# Altium PCB love-flow-lamp.PcbDoc
Units mil, origin at the board's own origin, x right, y up, seen from the top; angles counter-clockwise.
Board outline 3937.01 x 3932.01 mil, 2 copper layers (Top Layer, Bottom Layer); 75 components, 71 nets, 193 pads, 8 vias.
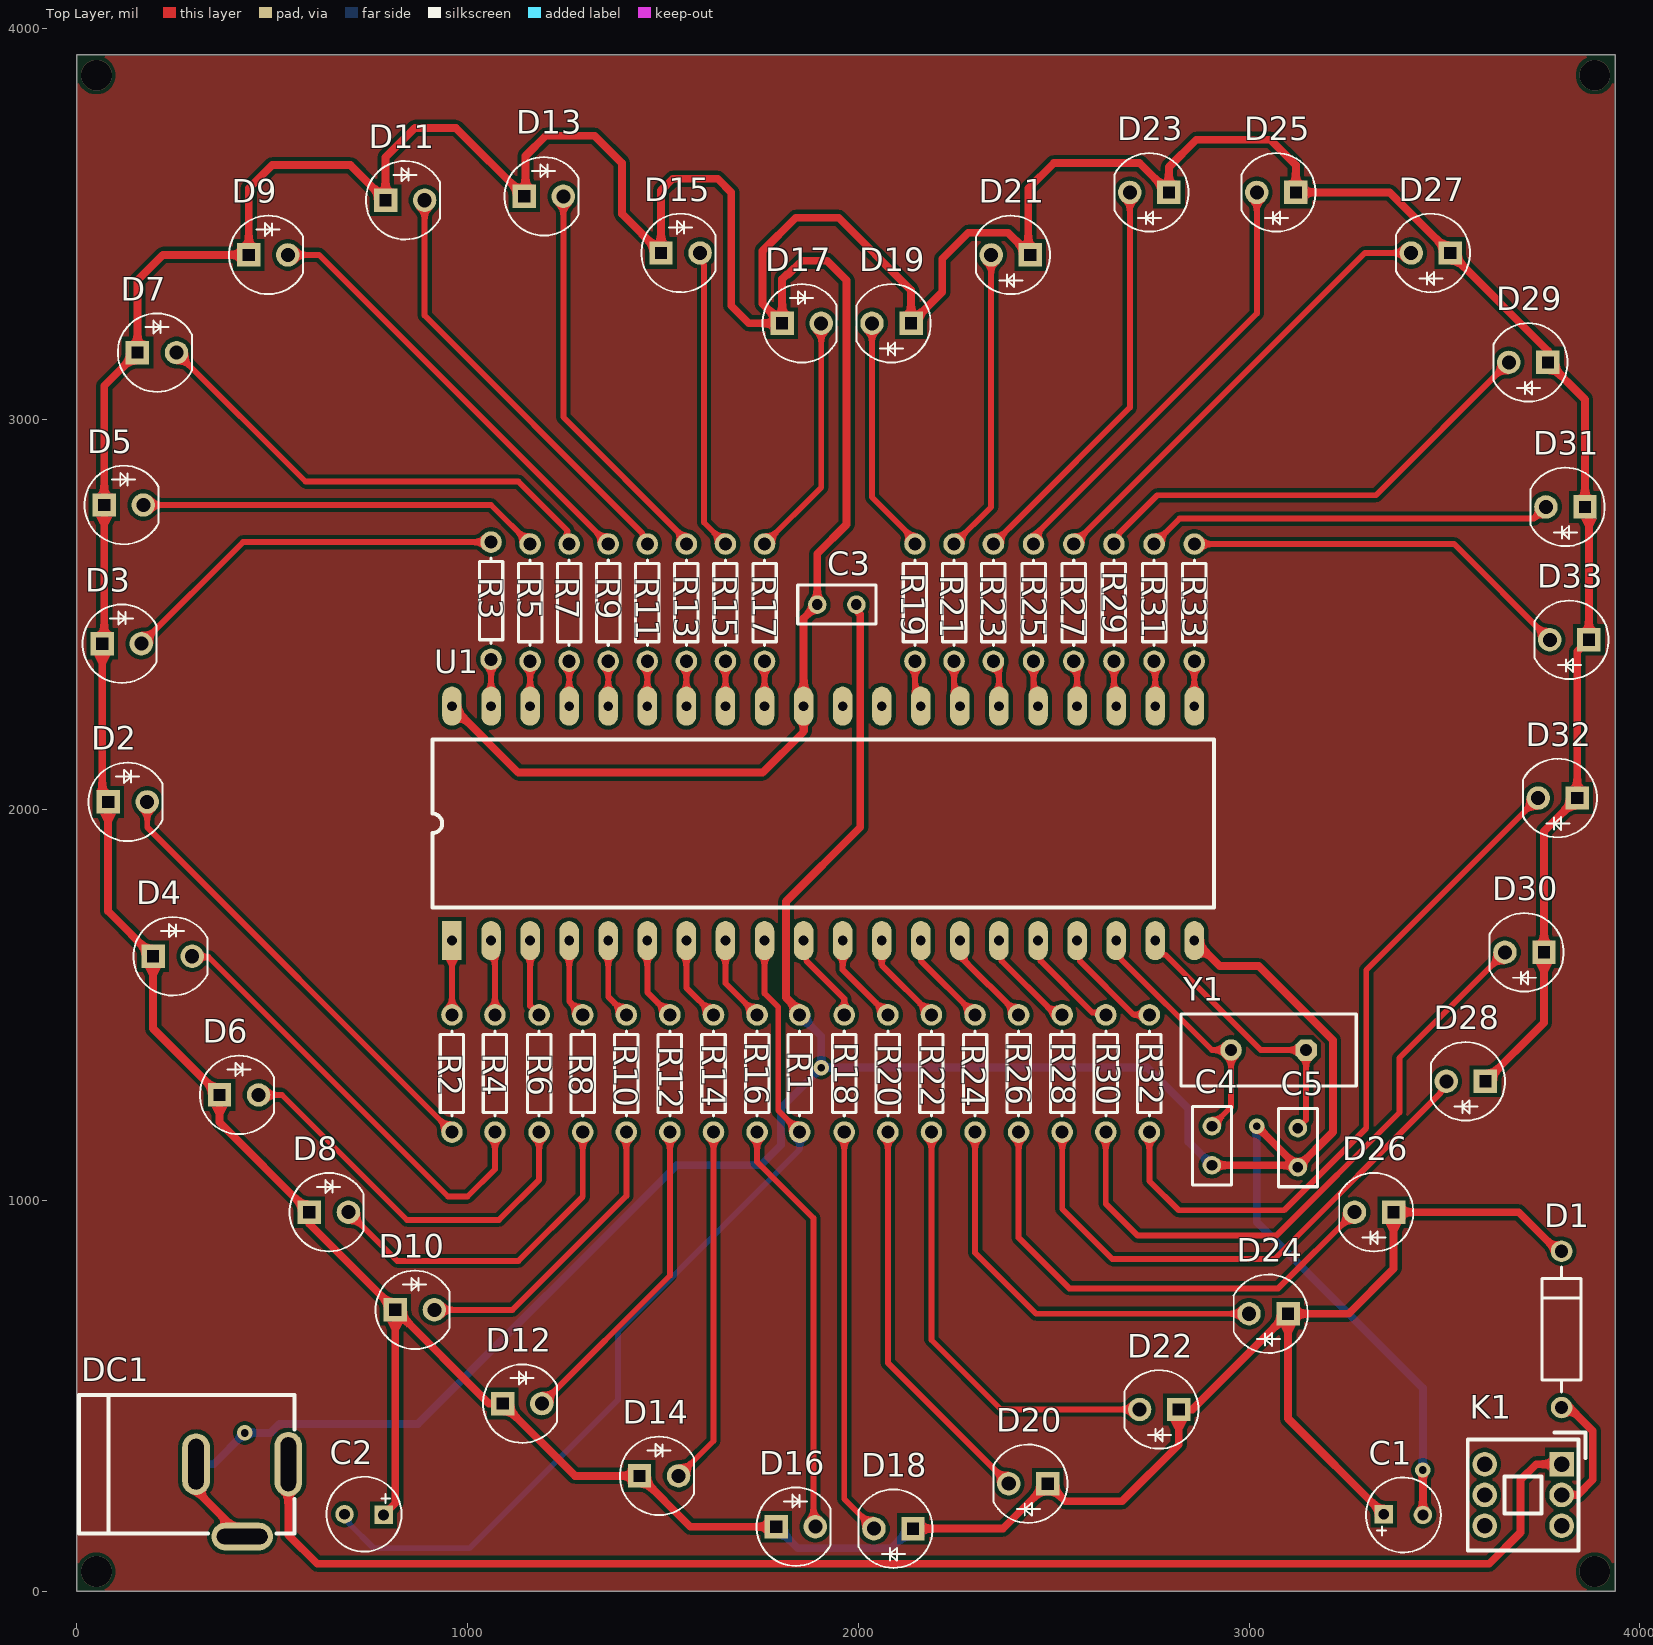
[diagram p0: Top Layer view]
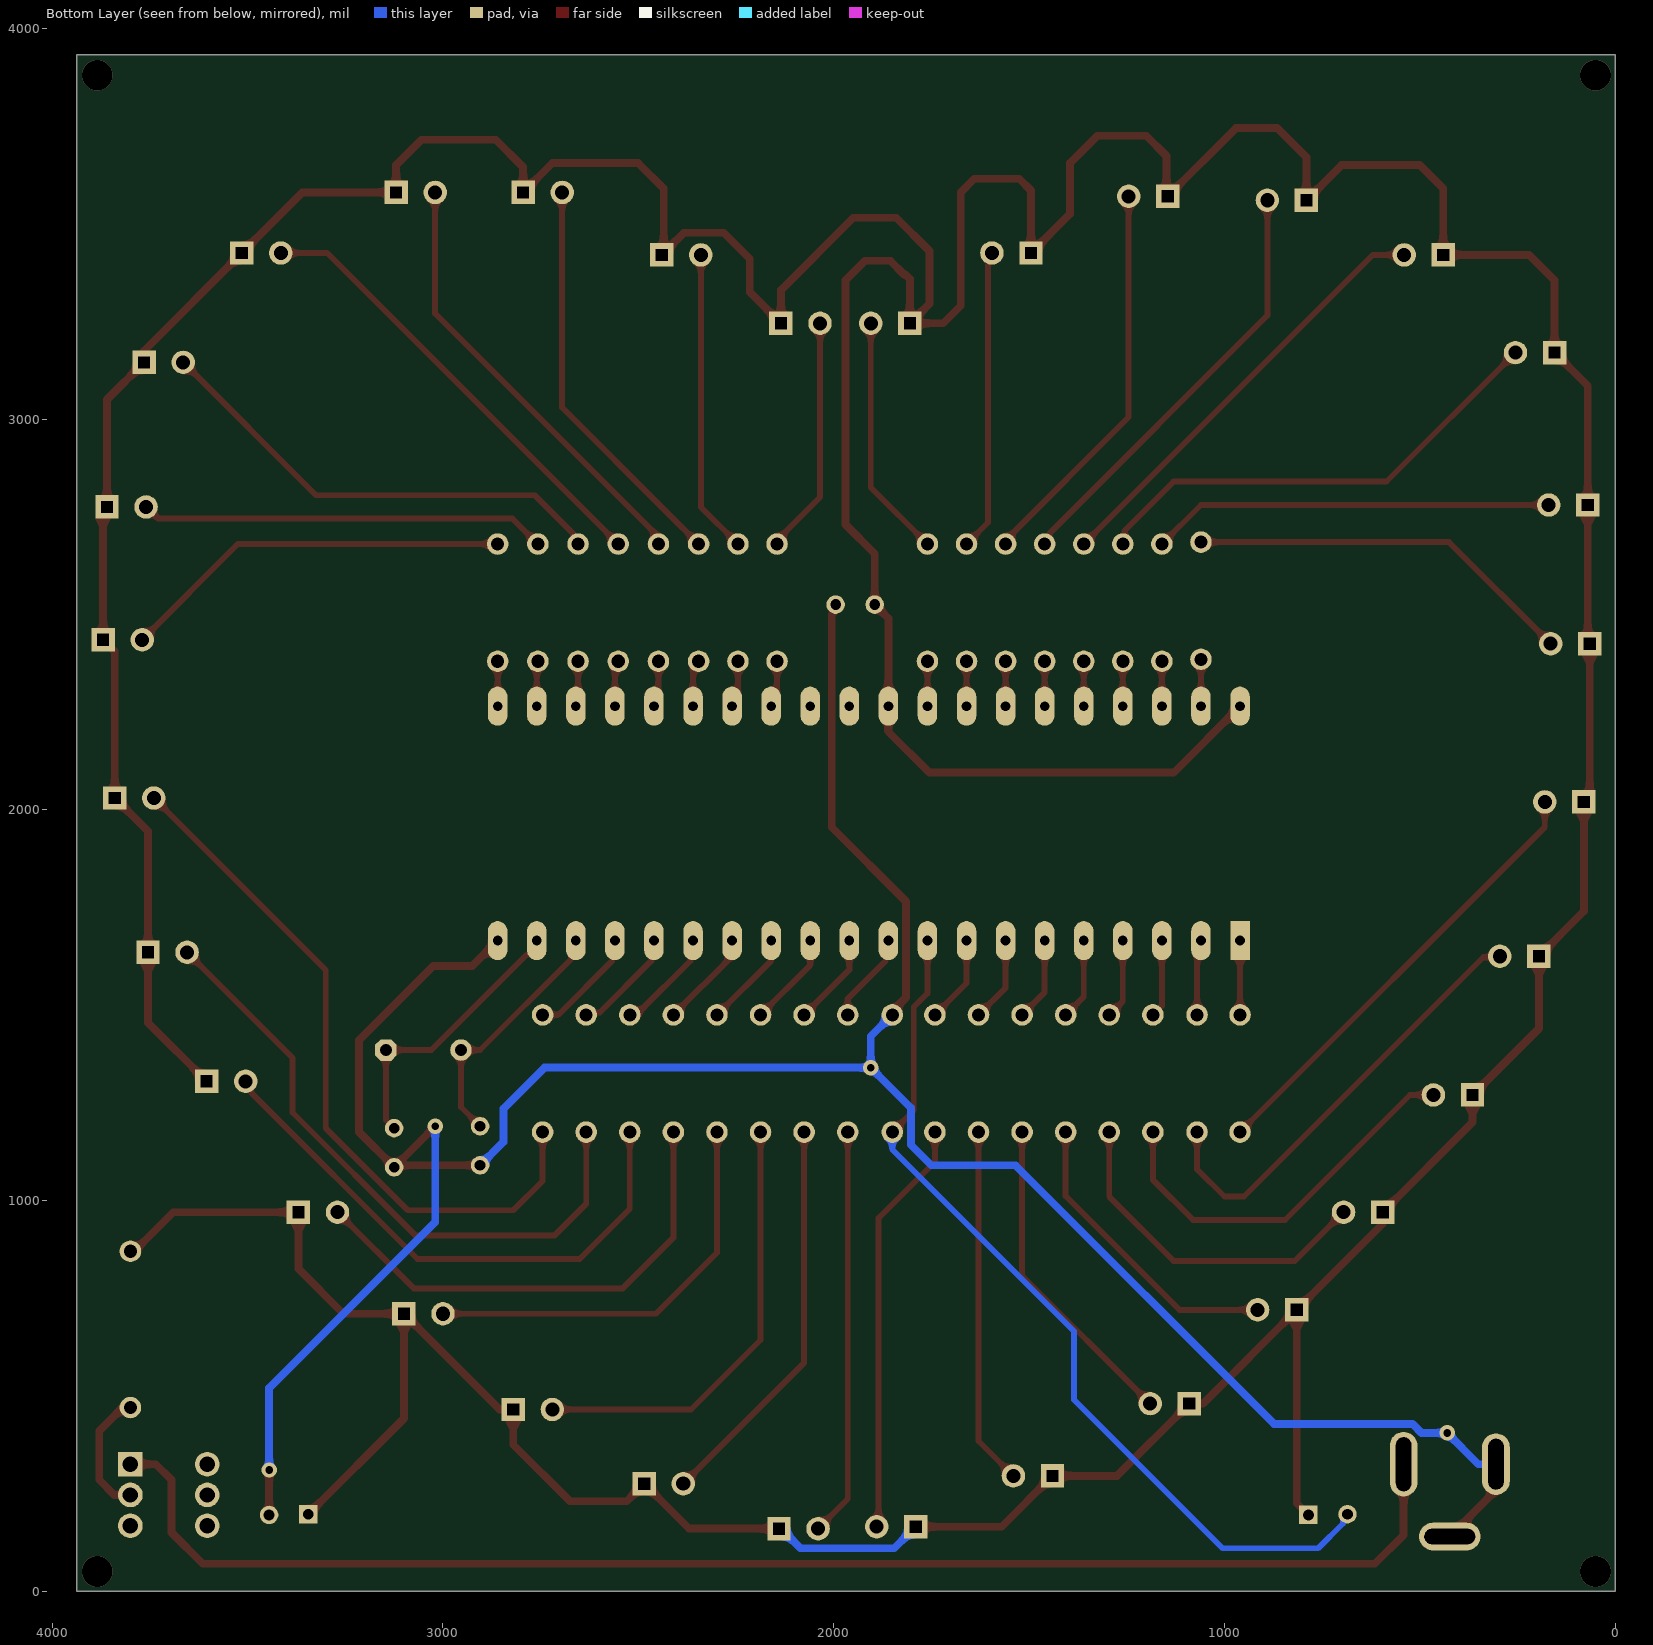
[diagram p1: Bottom Layer view, seen from below]

## Layer stack, top to bottom
Top Solder: solder mask 0.4, Solder Resist, Dk 3.5
Top Layer: signal copper 1.4
Dielectric 1: dielectric 12.6, FR-4, Dk 4.8
Bottom Layer: signal copper 1.4
Bottom Solder: solder mask 0.4, Solder Resist, Dk 3.5

## Board outline
0,0 0,3932.01 3937.01,3932.01 3937.01,0

## Design rules (kind name [scope] priority, off if disabled: settings)
Clearance [All] p1: gap=10 ignorepadtopadclearanceinfootprint=FALSE except(0: Arc-Hole Track-Hole SMDPad-Hole THPad-Hole Via-Hole Fill-Hole Poly-Hole Region-Hole Text-Hole)
PolygonConnect [All] p1: connectstyle=Relief reliefconductorwidth=10 reliefentries=4 polygonreliefangle="90 Angle" airgapwidth=10
RoutingVias [All] p1: holewidth=28 width=50 viastyle="Through Hole" minholewidth=28 minwidth=50 maxholewidth=28 maxwidth=50
SolderMaskExpansion [All] p1: expansion=4 istentingtop=FALSE
Width Width_D1-1 [InNet('NetD1_1')] p1: maxlimit=20 minlimit=20 preferedwidth=20
Width Width_DC1 [InNet('NetDC1_1')] p2: maxlimit=20 minlimit=20 preferedwidth=20
Width Width_GND [InNet('GND')] p3: maxlimit=20 minlimit=20 preferedwidth=20
Width Width_POWER [InNet('POWER')] p4: maxlimit=20 minlimit=20 preferedwidth=20
Width [All] p5: maxlimit=15 minlimit=15 preferedwidth=15
30 further rules are at their usual default settings.

## Components (designator, comment, footprint, x,y, rotation, side; value= is the part's Value field where it differs from the comment)
C1 "Cap Pol1" RB1 3395,195 r180 top value=10uF
C2 "Cap Pol1" RB1 735,197 r0 top value=10uF
C3 "Cap" RAD-0.1 1945,2525 r0 top value=104
C4 "Cap" RAD-0.1 2905,1140 r90 top value=30pF
C5 "Cap" RAD-0.1 3125,1135 r90 top value=30pF
D1 "1N4007" DIODE-0.4 3800,670 r90 top
D2 "LED0" LED 130,2020 r0 top
D3 "LED0" LED 115,2425 r0 top
D4 "LED0" LED 245,1625 r0 top
D5 "LED0" LED 120,2780 r0 top
D6 "LED0" LED 415,1270 r0 top
D7 "LED0" LED 205,3170 r0 top
D8 "LED0" LED 645,970 r0 top
D9 "LED0" LED 490,3420 r0 top
D10 "LED0" LED 865,720 r0 top
D11 "LED0" LED 840,3560 r0 top
D12 "LED0" LED 1140,480 r0 top
D13 "LED0" LED 1195,3570 r0 top
D14 "LED0" LED 1490,295 r0 top
D15 "LED0" LED 1545,3425 r0 top
D16 "LED0" LED 1840,165 r0 top
D17 "LED0" LED 1855,3245 r0 top
D18 "LED0" LED 2090,160 r180 top
D19 "LED0" LED 2085,3245 r180 top
D20 "LED0" LED 2435,275 r180 top
D21 "LED0" LED 2390,3420 r180 top
D22 "LED0" LED 2770,465 r180 top
D23 "LED0" LED 2745,3580 r180 top
D24 "LED0" LED 3050,710 r180 top
D25 "LED0" LED 3070,3580 r180 top
D26 "LED0" LED 3320,970 r180 top
D27 "LED0" LED 3465,3425 r180 top
D28 "LED0" LED 3555,1305 r180 top
D29 "LED0" LED 3715,3145 r180 top
D30 "LED0" LED 3705,1635 r180 top
D31 "LED0" LED 3810,2775 r180 top
D32 "LED0" LED 3790,2030 r180 top
D33 "LED0" LED 3820,2435 r180 top
DC1 "DC header" DC 423.11,232.41 r0 top
K1 "KEY" KEY-6 3701.59,246.26 r0 top
R1 "Res2" AXIAL-0.3 1850,1325 r90 top value=10K
R2 "Res2" AXIAL-0.3 960,1325 r90 top value=1K
R3 "Res2" AXIAL-0.3 1060,2535 r90 top value=1K
R4 "Res2" AXIAL-0.3 1070,1325 r90 top value=1K
R5 "Res2" AXIAL-0.3 1160,2530 r90 top value=1K
R6 "Res2" AXIAL-0.3 1183.12,1325 r90 top value=1K
R7 "Res2" AXIAL-0.3 1260,2530 r90 top value=1K
R8 "Res2" AXIAL-0.3 1294.69,1325 r90 top value=1K
R9 "Res2" AXIAL-0.3 1360,2530 r90 top value=1K
R10 "Res2" AXIAL-0.3 1406.25,1325 r90 top value=1K
R11 "Res2" AXIAL-0.3 1460,2530 r90 top value=1K
R12 "Res2" AXIAL-0.3 1517.81,1325 r90 top value=1K
R13 "Res2" AXIAL-0.3 1560,2530 r90 top value=1K
R14 "Res2" AXIAL-0.3 1629.38,1325 r90 top value=1K
R15 "Res2" AXIAL-0.3 1660,2530 r90 top value=1K
R16 "Res2" AXIAL-0.3 1740.94,1325 r90 top value=1K
R17 "Res2" AXIAL-0.3 1760,2530 r90 top value=1K
R18 "Res2" AXIAL-0.3 1964.06,1325 r90 top value=1K
R19 "Res2" AXIAL-0.3 2145,2530 r90 top value=1K
R20 "Res2" AXIAL-0.3 2075.62,1325 r90 top value=1K
R21 "Res2" AXIAL-0.3 2245,2530 r90 top value=1K
R22 "Res2" AXIAL-0.3 2187.19,1325 r90 top value=1K
R23 "Res2" AXIAL-0.3 2345.71,2530 r90 top value=1K
R24 "Res2" AXIAL-0.3 2298.75,1325 r90 top value=1K
R25 "Res2" AXIAL-0.3 2448.57,2530 r90 top value=1K
R26 "Res2" AXIAL-0.3 2410.31,1325 r90 top value=1K
R27 "Res2" AXIAL-0.3 2551.43,2530 r90 top value=1K
R28 "Res2" AXIAL-0.3 2521.88,1325 r90 top value=1K
R29 "Res2" AXIAL-0.3 2654.29,2530 r90 top value=1K
R30 "Res2" AXIAL-0.3 2633.44,1325 r90 top value=1K
R31 "Res2" AXIAL-0.3 2757.14,2530 r90 top value=1K
R32 "Res2" AXIAL-0.3 2745,1325 r90 top value=1K
R33 "Res2" AXIAL-0.3 2860,2530 r90 top value=1K
U1 "STC89C52RC" PDIP-40 1910,1965 r90 top
Y1 "12M" BCY-W2/E4.7 3050,1385 r180 top

## Footprints (in the part's own frame and the unit in brackets; to place one, negate y for a bottom-side part, rotate by r counter-clockwise, add the part's x,y. Pads: shape width x height; smd on the part's side, far side on the other; paste and mask are expansions set on the pad)
AXIAL-0.3 [mm] "Axial Device, Thru-Hole; 2 Leads; 0.3 in Pin Spacing"
  round 1.4 hole 0.85: 1(-3.81,0) 2(3.81,0)
  silkscreen extent -2.77,-0.76 2.77,0.76
BCY-W2/E4.7 [mm] "Quartz Crystal, Thru-Hole; 2 Leads; Body 11.35 x 4.65 x 13.46 mm (LxWxH max)"
  oct 1.4x1.4 hole 0.8: 1(-2.44,0)
  round 1.4 hole 0.8: 2(2.44,0)
  silkscreen extent -5.7,-2.35 5.7,2.35
DC [mm] "DC header"
  oval 1.8x4.2 hole 1 slot 3.5 at 90 deg: 1(3,2.352)
  oval 1.8x4 hole 1 slot 3.3 at 90 deg: 2(-3,2.352)
  oval 4x1.8 hole 1 slot 3.3 at 0 deg: 3(0,-2.352)
  silkscreen extent -10.6,-2.15 3.4,6.85
DIODE-0.4 [mm]
  round 1.4 hole 0.85: 1(-5.08,0) 2(5.08,0)
  silkscreen extent -4.06,-1.27 4.06,1.27
KEY-6 [mm] "KEY-6"
  rect 1.6x1.6 hole 1: 1(2.5,2)
  round 1.6 hole 1: 2(2.5,0) 3(2.5,-2) 4(-2.5,2) 5(-2.5,0) 6(-2.5,-2)
  silkscreen extent -3.6,-3.6 4.06,4.06
LED [mil] "LED lamp footprint"
  rect 60x60 hole 30 square: 1(-50,0)
  round 60 hole 35.98: 2(50,0)
  silkscreen extent -100,-100 89,100
PDIP-40 [mil] "PDIP-40 STC89C52RC footprint"
  rect 100x50 hole 25: 1(-300,950)
  oval 100x50 hole 25: 2(-300,850) 3(-300,750) 4(-300,650) 5(-300,550) 6(-300,450) 7(-300,350) 8(-300,250) 9(-300,150) 10(-300,50) 11(-300,-50) 12(-300,-150) 13(-300,-250) 14(-300,-350) 15(-300,-450) 16(-300,-550) 17(-300,-650) 18(-300,-750) 19(-300,-850) 20(-300,-950) 21(300,-950) 22(300,-850) 23(300,-750) 24(300,-650) 25(300,-550) 26(300,-450) 27(300,-350) 28(300,-250) 29(300,-150) 30(300,-50) 31(300,50) 32(300,150) 33(300,250) 34(300,350) 35(300,450) 36(300,550) 37(300,650) 38(300,750) 39(300,850) 40(300,950)
  silkscreen extent -215,-1000 215,1000
RAD-0.1 [mm]
  round 1.2 hole 0.7: 1(-1.27,0) 2(1.27,0)
  silkscreen extent -2.54,-1.27 2.54,1.27
RB1 [mm]
  rect 1.2x1.2 hole 0.7: 1(1.27,-0.051)
  round 1.2 hole 0.7: 2(-1.27,0)
  silkscreen extent -2.44,-2.43 2.43,2.43

## Part data
C1 C2: "Polarized Capacitor (Radial)", LatestRevisionDate=17-Jul-2002, LatestRevisionNote="Re-released for DXP Platform.", PackageDescription="Polarized Capacitor (Radial); 2 Leads", PackageReference=RB7.6-15, Published=8-Jun-2000, Publisher="Altium Limited"
C3 C4 C5: "Capacitor", LatestRevisionDate=17-Jul-2002, LatestRevisionNote="Re-released for DXP Platform.", PackageDescription="Radial Cap, Thru-Hole; 2 Leads; 0.3 in Pin Spacing", PackageReference=RAD-0.3, Published=8-Jun-2000, Publisher="Altium Limited"
D1: library part "Diode 1N4007", "1 Amp General Purpose Rectifier", Code_JEDEC=DO-204-AL, ComponentLink1Description="Manufacturer Link", ComponentLink1URL=http://www.fairchildsemi.com/, ComponentLink2Description=Datasheet, ComponentLink2URL=http://www.fairchildsemi.com/ds/1N%2F1N4001.pdf, DatasheetVersion=1998, LatestRevisionDate=17-Jul-2002, LatestRevisionNote="Re-released for DXP Platform.", PackageDescription="Diode, Axial; Body 5.2 x 2.7 mm (LxDia. max), Lead Dia. 0.86 mm (max)", PackageReference=DO-41, PackageVersion=Aug-1999, Published=8-Jun-2000, Publisher="Altium Limited"
D2 D3 D4 D5 D6 D7 D8 D9 D10 D11 D12 D13 D14 D15 D16 D17 D18 D19 D20 D21 D22 D23 D24 D25 D26 D27 D28 D29 D30 D31 D32 D33: "Typical INFRARED GaAs LED", LatestRevisionDate=08-Jul-2005, LatestRevisionNote="Mech Layer 1 removed.", PackageDescription="LED; 2 Leads", PackageReference=LED-0, Published=8-Jun-2000, Publisher="Altium Limited"
DC1: library part DC
R1 R2 R3 R4 R5 R6 R7 R8 R9 R10 R11 R12 R13 R14 R15 R16 R17 R18 R19 R20 R21 R22 R23 R24 R25 R26 R27 R28 R29 R30 R31 R32 R33: "Resistor", LatestRevisionDate=17-Jul-2002, LatestRevisionNote="Re-released for DXP Platform.", PackageDescription="Axial Device, Thru-Hole; 2 Leads; 0.4 in Pin Spacing", PackageReference=AXIAL-0.4, Published=8-Jun-2000, Publisher="Altium Limited"
Y1: library part XTAL, "Crystal Oscillator", LatestRevisionDate=17-Jul-2002, LatestRevisionNote="Re-released for DXP Platform.", PackageDescription="Crystal, Thru-Hole; 2 Leads; Body 3.1 x 8.2 mm (Dia.xH)", PackageReference=R38, Published=8-Jun-2000, Publisher="Altium Limited"

## Via types
v1: diameter 39.37, hole 19.68, Top Layer to Bottom Layer, 4 vias
v2: diameter 78.74, hole 78.74, Top Layer to Bottom Layer, 4 vias

## Nets (pads, with @x,y where several pads share a name; then routed paths per layer and width w, separated by ;. In a path a pad name is that pad's centre, name@x,y a point inside that pad or via, vN(x,y) a via of type N, cw(c..) or ccw(c..) an arc to the next point about the centre after c; other vN are vias at no path point)
GND: C1.2 C3.2 C4.1 C5.1 DC1.2 DC1.3 R1.2 U1.20 | length 7133.1
  Top Layer w20: DC1.2 305,257.93 DC1.3 ; R1.2 1850,1484.27 1815,1519.27 1815,1765 2005,1955 2005,2499.66 2000.21,2504.45 2000.21,2519.79 C3.2 ; U1.20 2925,1600 3025,1600 3215,1410 3215,1175 C5.1 ; C4.1 3120,1090 C5.1 ; v1(3020,1190) C5.1 ; C1.2 v1(3445,310)
  Bottom Layer w20: DC1.2 350,325 v1(430,405) 495.58,405 518.26,427.68 872.68,427.68 1535,1090 1750,1090 1802.44,1142.44 1802.44,1237.44 v1(1905,1340) ; R1.2 1905,1420 v1(1905,1340) ; C4.1 2845,1150 2845,1235 2740,1340 v1(1905,1340) ; v1(3020,1190) 3020,945 3445,520 v1(3445,310)
NetC4_2: C4.2 U1.18 Y1.2 | length 645.7
  Top Layer w15: U1.18 2660,1630.53 2673.59,1616.94 2673.59,1616.41 2905,1385 Y1.2 2953.94,1238.94 C4.2
NetC5_2: C5.2 U1.19 Y1.1 | length 719.9
  Top Layer w15: U1.19 2760,1649.47 2780.56,1628.91 2786.09,1628.91 3030,1385 Y1.1 3146.06,1206.06 C5.2
NetD1_1: D1.1 K1.2 | length 344.4
  Top Layer w15: K1.2 K1.2@3809,246.26
  Top Layer w20: K1.2 3841.26,246.26 3880,285 3880,410 3820,470 D1.1 D1.1@3809.5,470
NetD2_2: D2.2 R2.1 | length 1168.1
  Top Layer w15: D2.2 180,1955 R2.1
NetD3_2: D3.2 R3.2 | length 1002.7
  Top Layer w15: D3.2 425,2685 R3.2
NetD4_2: D4.2 R4.1 | length 1153.7
  Top Layer w15: D4.2 297.12,1622.88 337.12,1622.88 950,1010 1000,1010 1070,1080 R4.1
NetD5_2: D5.2 R5.2 | length 1031.4
  Top Layer w15: D5.2 1060,2780 R5.2
NetD6_2: D6.2 R6.1 | length 1015.3
  Top Layer w15: D6.2 525,1270 845,950 1080,950 1183.13,1053.13 R6.1
NetD7_2: D7.2 R7.2 | length 1225.5
  Top Layer w15: D7.2 585,2840 1130,2840 1254.6,2715.4 1254.6,2685.4 R7.2
NetD8_2: D8.2 R8.1 | length 885
  Top Layer w15: D8.2 820,845 1130,845 1294.69,1009.69 R8.1
NetD9_2: D9.2 R9.2 | length 1126.5
  Top Layer w15: D9.2 620,3420 R9.2
NetD10_2: D10.2 R10.1 | length 775.6
  Top Layer w15: D10.2 1115,720 1406.25,1011.25 R10.1
NetD11_2: D11.2 R11.2 | length 1116.1
  Top Layer w15: D11.2 890,3265 1447.1,2707.9 1447.1,2703.75 1460,2690.86 R11.2
NetD12_2: D12.2 R12.1 | length 830.8
  Top Layer w15: D12.2 1517.81,807.81 R12.1
NetD13_2: D13.2 R13.2 | length 1020.5
  Top Layer w15: D13.2 1245,3005 1560,2690 R13.2
NetD14_2: D14.2 R14.1 | length 917
  Top Layer w15: D14.2 1629.38,384.38 R14.1
NetD15_2: D15.2 R15.2 | length 771.9
  Top Layer w15: D15.2 1603.61,3416.39 1603.61,3395.1 1605,3393.71 1605,2735 R15.2
NetD16_2: D16.2 R16.1 | length 1071.7
  Top Layer w15: R16.1 1740.94,1099.06 1885,955 1885,170 D16.2
NetD17_2: D17.2 R17.2 | length 625.1
  Top Layer w15: R17.2 1905,2825 D17.2
NetD18_2: D18.2 R18.1 | length 1046.5
  Top Layer w15: R18.1 1964.06,235.94 D18.2
NetD19_2: D19.2 R19.2 | length 610.6
  Top Layer w15: D19.2 2035,2800 2145,2690 R19.2
NetD20_2: D20.2 R20.1 | length 1028.1
  Top Layer w15: R20.1 2075.63,584.37 D20.2
NetD21_2: D21.2 R21.2 | length 779.4
  Top Layer w15: R21.2 2340,2775 D21.2
NetD22_2: D22.2 R22.1 | length 1138.7
  Top Layer w15: R22.1 2187.19,642.81 2365,465 D22.2
NetD23_2: D23.2 R23.2 | length 1044.7
  Top Layer w15: R23.2 2423.57,2757.86 2695,3029.29 D23.2
NetD24_2: D24.2 R24.1 | length 1074.7
  Top Layer w15: R24.1 2298.75,866.25 2455,710 D24.2
NetD25_2: D25.2 R25.2 | length 1136.7
  Top Layer w15: R25.2 2456.25,2687.68 2456.25,2706.25 3020,3270 D25.2
NetD26_2: D26.2 R26.1 | length 1264.5
  Top Layer w15: R26.1 2410.31,904.69 2540,775 3075,775 D26.2
NetD27_2: D27.2 R27.2 | length 1172.2
  Top Layer w15: R27.2 3296.43,3425 D27.2
NetD28_2: D28.2 R28.1 | length 1430.3
  Top Layer w15: R28.1 2521.88,978.12 2650,850 3065,850 3490.38,1275.38 3490.38,1278.2 3505,1292.82 D28.2
NetD29_2: D29.2 R29.2 | length 1211.7
  Top Layer w15: R29.2 2654.29,2690.86 2667.54,2704.11 2667.54,2707.54 2765,2805 3325,2805 D29.2
NetD30_2: D30.2 R30.1 | length 1621.1
  Top Layer w15: R30.1 2633.44,991.56 2715,910 3070,910 3385,1225 3385,1365 D30.2
NetD31_2: D31.2 R31.2 | length 1042.2
  Top Layer w15: R31.2 2822.14,2745 3728.71,2745 3758.71,2775 D31.2
NetD32_2: D32.2 R32.1 | length 1825.3
  Top Layer w15: R32.1 2745,1050 2820,975 3090,975 3300,1185 3300,1590 D32.2
NetD33_2: D33.2 R33.2 | length 1011.5
  Top Layer w15: R33.2 3525,2680 D33.2
NetDC1_1: DC1.1 K1.1 | length 3655.3
  Top Layer w20: DC1.1 541.22,143.78 615,70 3615,70 3695,150 3695,285 3735,325 K1.1
NetR2_2: R2.2 U1.1 | length 190
  Top Layer w15: R2.2 U1.1
NetR3_1: R3.1 U1.39 | length 120
  Top Layer w15: U1.39 R3.1
NetR4_2: R4.2 U1.2 | length 224.6
  Top Layer w15: R4.2 1070,1655 U1.2 ; U1.2 1065,1660 U1.2
  Bottom Layer w10: R4.2@1053.44,1486.56 R4.2@1065,1475
NetR5_1: R5.1 U1.38 | length 115
  Top Layer w15: U1.38 R5.1
NetR6_2: R6.2 U1.3 | length 199.6
  Top Layer w15: U1.3 1160,1498.13 R6.2
NetR7_1: R7.1 U1.37 | length 115
  Top Layer w15: U1.37 R7.1
NetR8_2: R8.2 U1.4 | length 204.4
  Top Layer w15: U1.4 1260,1509.69 R8.2
NetR9_1: R9.1 U1.36 | length 115
  Top Layer w15: U1.36 R9.1
NetR10_2: R10.2 U1.5 | length 209.2
  Top Layer w15: U1.5 1360,1521.25 R10.2
NetR11_1: R11.1 U1.35 | length 115
  Top Layer w15: U1.35 R11.1
NetR12_2: R12.2 U1.6 | length 213.9
  Top Layer w15: U1.6 1460,1532.81 R12.2
NetR13_1: R13.1 U1.34 | length 115
  Top Layer w15: U1.34 R13.1
NetR14_2: R14.2 U1.7 | length 218.7
  Top Layer w15: U1.7 1560,1544.38 R14.2
NetR15_1: R15.1 U1.33 | length 115
  Top Layer w15: U1.33 R15.1
NetR16_2: R16.2 U1.8 | length 223.5
  Top Layer w15: U1.8 1660,1555.94 R16.2
NetR17_1: R17.1 U1.32 | length 115
  Top Layer w15: U1.32 R17.1
NetR18_2: R18.2 U1.10 | length 233.4
  Top Layer w15: U1.10 1866.7,1658.3 1866.7,1613.79 1964.38,1516.11 1964.38,1475.31 R18.2
NetR19_1: R19.1 U1.28 | length 121.2
  Top Layer w15: R19.1 2145,2280 U1.28
NetR20_2: R20.2 U1.11 | length 237.9
  Top Layer w15: U1.11 1960,1590.63 R20.2
NetR21_1: R21.1 U1.27 | length 121.2
  Top Layer w15: R21.1 2245,2280 U1.27
NetR22_2: R22.2 U1.12 | length 242.7
  Top Layer w15: U1.12 2060,1602.19 R22.2
NetR23_1: R23.1 U1.26 | length 120.9
  Top Layer w15: R23.1 2360,2365.71 U1.26
NetR24_2: R24.2 U1.13 | length 247.5
  Top Layer w15: U1.13 2160,1613.75 R24.2
NetR25_1: R25.1 U1.25 | length 119.7
  Top Layer w15: R25.1 2448.57,2276.43 U1.25
NetR26_2: R26.2 U1.14 | length 252.3
  Top Layer w15: U1.14 2260,1625.31 R26.2
NetR27_1: R27.1 U1.24 | length 118.6
  Top Layer w15: R27.1 2560,2371.43 U1.24
NetR28_2: R28.2 U1.15 | length 266.9
  Top Layer w15: U1.15 2366.7,1658.3 2366.7,1613.3 2497.32,1482.68 2514.2,1482.68 R28.2
NetR29_1: R29.1 U1.23 | length 117.4
  Top Layer w15: R29.1 2654.29,2270.71 U1.23
NetR30_2: R30.2 U1.16 | length 278.5
  Top Layer w15: U1.16 2466.7,1658.3 2466.7,1613.3 2598.82,1481.18 2627.26,1481.18 R30.2
NetR31_1: R31.1 U1.22 | length 116.2
  Top Layer w15: R31.1 2760,2377.14 U1.22
NetR32_2: R32.2 U1.17 | length 290.1
  Top Layer w15: U1.17 2566.7,1658.3 2566.7,1613.3 2704.6,1475.4 2744.6,1475.4 R32.2
NetR33_1: R33.1 U1.21 | length 115
  Top Layer w15: U1.21 R33.1
POWER: C1.1 C2.1 C3.1 D1.2 D2.1 D3.1 D4.1 D5.1 D6.1 D7.1 D8.1 D9.1 D10.1 D11.1 D12.1 D13.1 D14.1 D15.1 D16.1 D17.1 D18.1 D19.1 D20.1 D21.1 D22.1 D23.1 D24.1 D25.1 D26.1 D27.1 D28.1 D29.1 D30.1 D31.1 D32.1 D33.1 U1.31 U1.40 | length 18618.1
  Top Layer w20: C2.1 815,225 D10.1 ; U1.40 1130,2095 1755,2095 1860,2200 U1.31 1860,2490 C3.1 1895,2655 1970,2730 1970,3355 1920,3405 1855,3405 1820,3370 1816.72,3370 1805,3358.28 D17.1 ; D16.1 1570,165 D14.1 1275,295 D12.1 1055,480 D10.1 ; D18.1 2370,160 D20.1 2530,230 2675,230 2820,375 D22.1 2855,465 D24.1 ; C1.1 3100,442 D24.1 ; D28.1 3755,1455 D30.1 3755,1945 D32.1 3840,2405 D33.1 3870,2765 D31.1 3860,3050 D29.1 3765,3175 D27.1 3360,3580 D25.1 3120,3650 3055,3715 2865,3715 2795,3645 D23.1 2720,3655 2500,3655 2435,3590 2435,3425 D21.1 2383.28,3476.72 2281.72,3476.72 2215,3410 2215,3325 D19.1 2135,3330 1950,3515 1840,3515 1755,3430 1755,3295 D17.1 ; D1.2 3790,870 3690,970 D26.1 3370,825 3255,710 D24.1 ; D10.1 595,940 D8.1 365,1200 D6.1 195,1440 D4.1 80,1740 D2.1 65,2035 D3.1 70,2430 D5.1 70,3085 D7.1 155,3355 220,3420 D9.1 440,3590 500,3650 700,3650 D11.1 790,3670 865,3745 970,3745 D13.1 1148.28,3573.28 1148.28,3673.28 1200,3725 1325,3725 1395,3655 1395,3525 D15.1 1495,3585 1525,3615 1640,3615 1675,3580 1675,3290 1720,3245 D17.1
  Bottom Layer w20: D16.1 1845,110 2085,110 2135,160 D18.1
RESET: C2.2 R1.1 U1.9 | length 2305.4
  Top Layer w15: U1.9 1760,1530 1795,1495 1795,1230 R1.1
  Bottom Layer w15: C2.2 685,188.27 696.61,176.66 696.61,173.39 760,110 1005,110 1385,490 1385,665.21 1850,1130.21 R1.1
pads on no net: K1.3 K1.4 K1.5 K1.6 U1.29 U1.30
copper on no net:
  other v2: 50,50 3885,50 50,3880 3885,3880

## Polygon pours and split planes (outlines as drawn)
no net on Top Layer "NONET_L01_P000" (solid, pour order 0): 0,3930 3935,3930 3935,0 0,0